# Altium PCB MICandFilter_PCB_design.PcbDoc
Units mm, origin at the board's own origin, x right, y up, seen from the top; angles counter-clockwise.
Board outline 86.11 x 63.5 mm, 2 copper layers (Top Layer, Bottom Layer); 18 components, 12 nets, 56 pads, 0 vias.
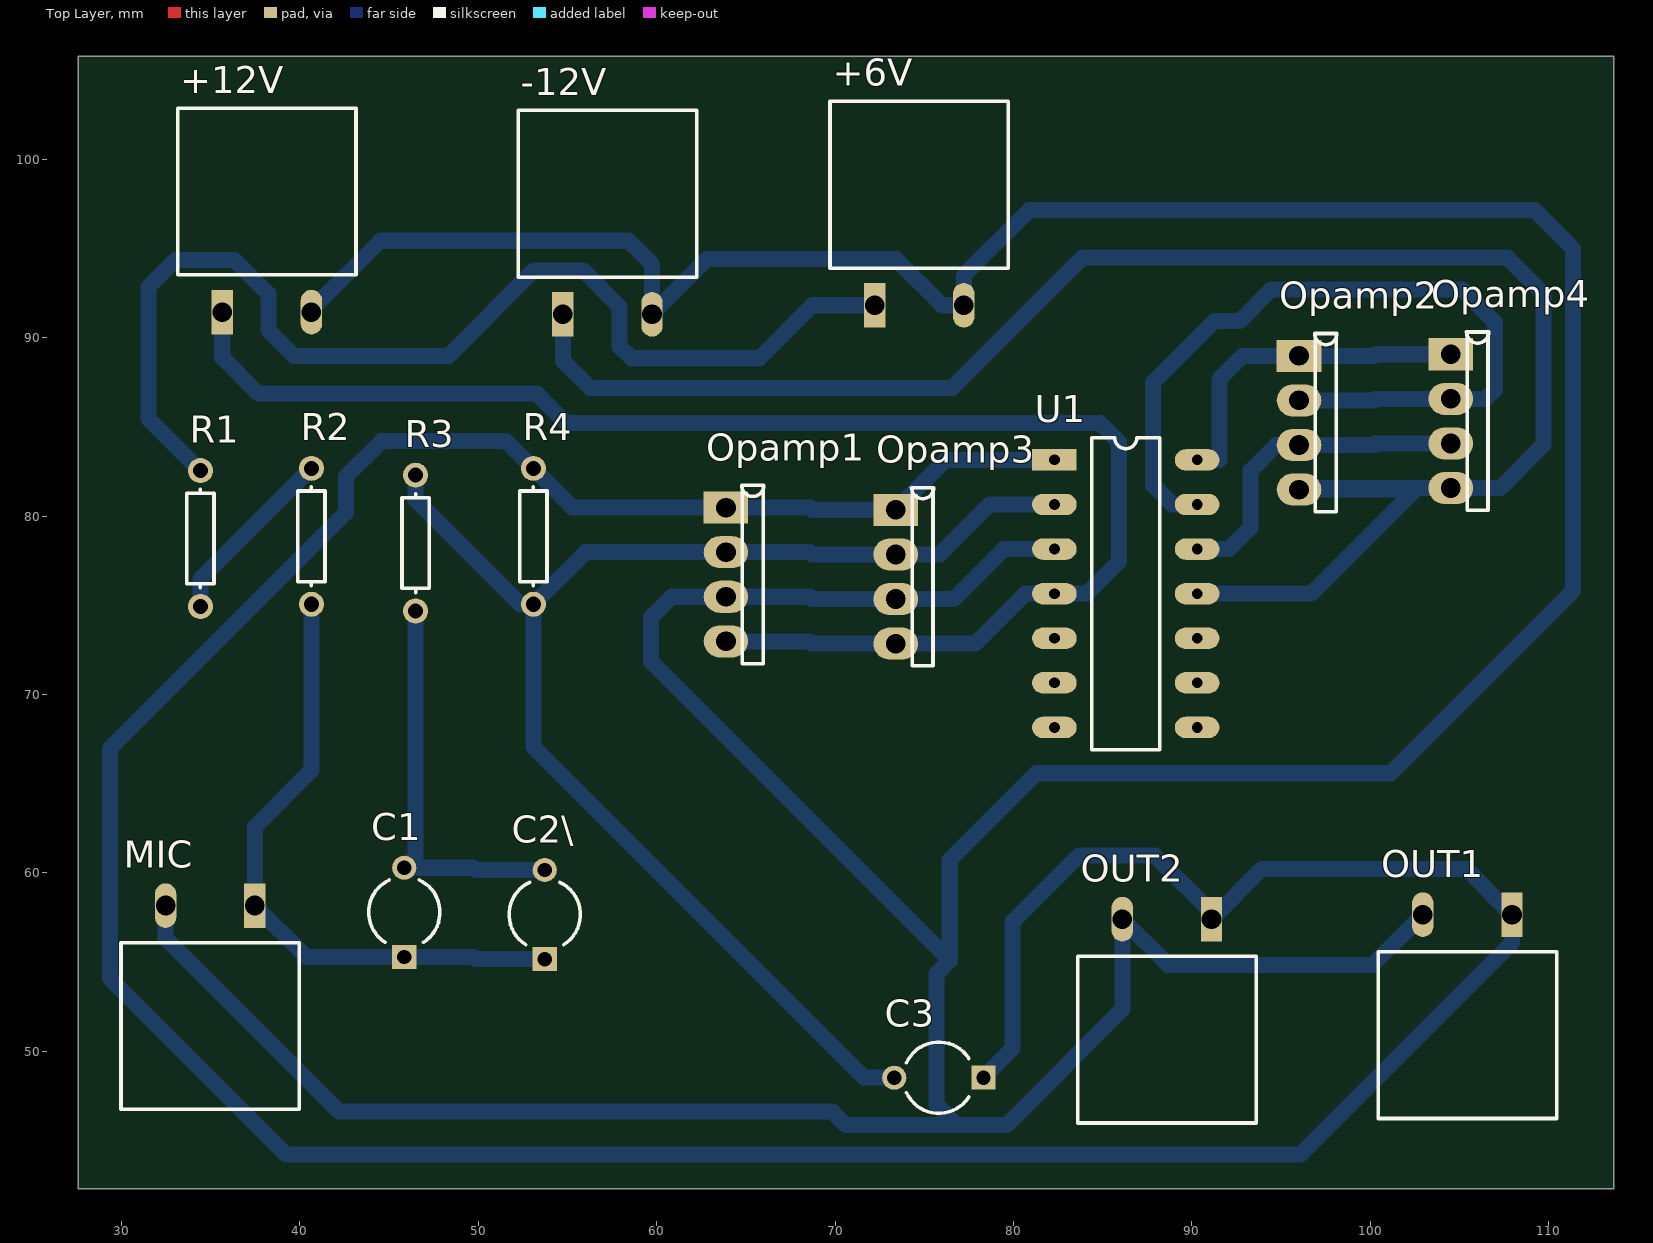
[diagram p0: Top Layer view]
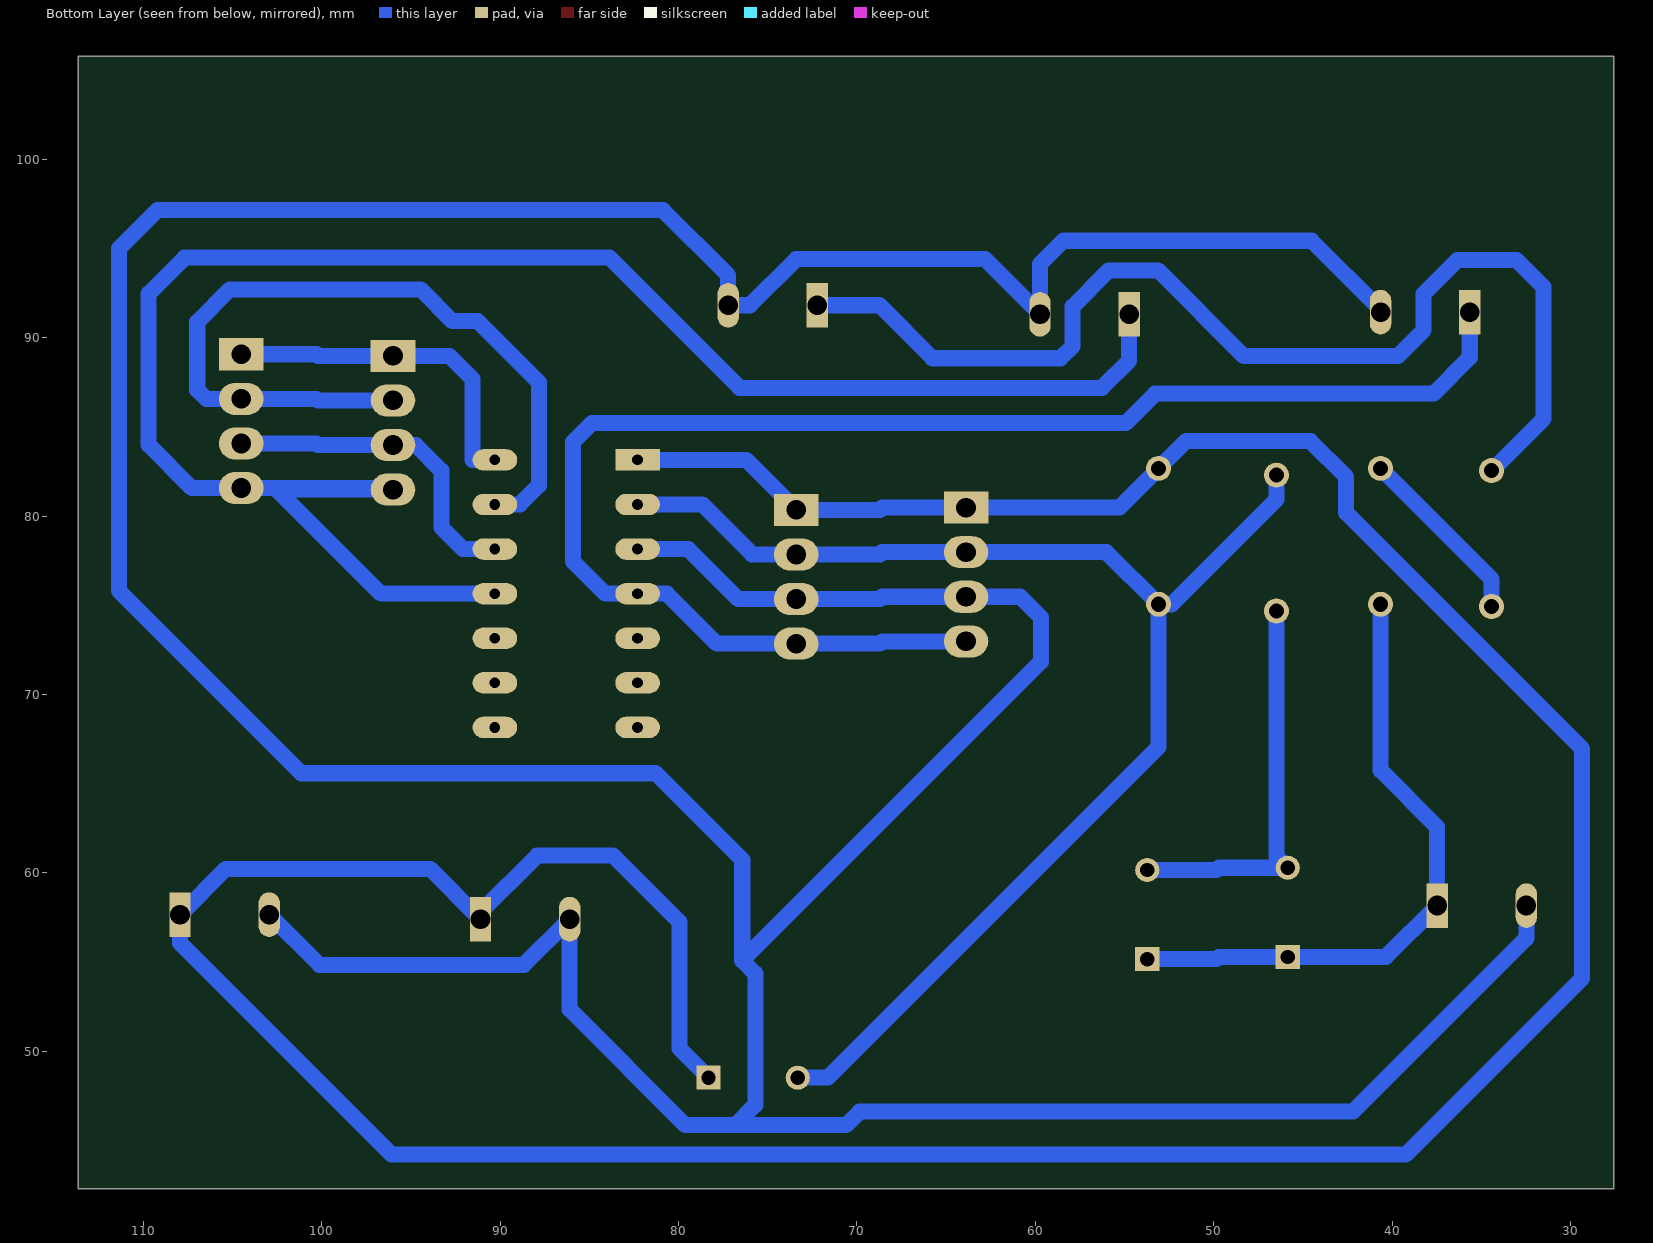
[diagram p1: Bottom Layer view, seen from below]

## Layer stack, top to bottom
Top Solder: solder mask 0.0102, Solder Resist, Dk 3.5
Top Layer: signal copper 0.0356
Dielectric 1: dielectric 0.32, FR-4, Dk 4.8
Bottom Layer: signal copper 0.0356
Bottom Solder: solder mask 0.0102, Solder Resist, Dk 3.5

## Board outline
27.559,105.791 113.665,105.791 113.665,42.291 27.559,42.291

## Design rules (kind name [scope] priority, off if disabled: settings)
Clearance [All] p1: gap=0.762 ignorepadtopadclearanceinfootprint=FALSE except(0: Text-Hole; 0.254: Text-Text)
PolygonConnect [All] p1: connectstyle=Relief reliefconductorwidth=0.254 reliefentries=4 polygonreliefangle="90 Angle" airgapwidth=0.254
RoomDefinition MICandFilter [InComponentClass('MICandFilter')] p1: confinementstyle=ConfineIn formatcopy=TRUE lockcomponents=FALSE outline 27.686,42.164 114.046,42.164 114.046,105.918 27.686,105.918
RoutingLayers [All] p1: top layer_v5=FALSE bottom layer_v5=TRUE
RoutingVias [All] p1: holewidth=0.711 width=1.27 viastyle="Through Hole" minholewidth=0.711 minwidth=1.27 maxholewidth=0.711 maxwidth=1.27
SolderMaskExpansion [All] p1: expansion=0.102
Width [All] p1: maxlimit=1 minlimit=0.254 preferedwidth=0.9 toplayer_maxwidth=0.254 toplayer_prefwidth=0.254 bottomlayer_minwidth=0.8 minimp=50.000000 maximp=50.000000 favimp=50.000000
29 further rules are at their usual default settings.

## Components (designator, comment, footprint, x,y, rotation, side; value= is the part's Value field where it differs from the comment)
+6V "Component_1" ConnectorBlue 72.216,91.821 r90 top
+12V "Component_1" ConnectorBlue 35.64,91.44 r90 top
-12V "Component_1" ConnectorBlue 54.737,91.313 r90 top
C1 "Cap2" CAPR5-4X5 45.847,57.785 r90 top value=4.7uf
C2\ "Cap2" CAPR5-4X5 53.721,57.658 r90 top value=3.3uF
C3 "Cap2" CAPR5-4X5 75.819,48.514 r180 top value=473
MIC "Component_1" ConnectorBlue 37.465,58.166 r270 top
Opamp1 "OLED" OLEDHEADER 63.881,80.478 r0 top
Opamp2 "OLED" OLEDHEADER 96.012,88.987 r0 top
Opamp3 "OLED" OLEDHEADER 73.406,80.351 r0 top
Opamp4 "OLED" OLEDHEADER 104.521,89.074 r0 top
OUT1 "Component_1" ConnectorBlue 107.95,57.658 r270 top
OUT2 "Component_1" ConnectorBlue 91.106,57.404 r270 top
R1 "Res1" AXIAL-0.3 34.417,78.74 r90 top value=560
R2 "Res1" AXIAL-0.3 40.64,78.867 r90 top value=560
R3 "Res1" AXIAL-0.3 46.482,78.486 r90 top value=1K
R4 "Res1" AXIAL-0.3 53.086,78.867 r90 top value=10K
U1 "Component_1" LM324N 82.297,83.152 r0 top

## Footprints (in the part's own frame and the unit in brackets; to place one, negate y for a bottom-side part, rotate by r counter-clockwise, add the part's x,y. Pads: shape width x height; smd on the part's side, far side on the other; paste and mask are expansions set on the pad)
AXIAL-0.3 [mm] "Axial Device, Thru-Hole; 2 Leads; 0.3 in Pin Spacing"
  round 1.4 hole 0.85: 1(-3.81,0) 2(3.81,0)
  silkscreen extent -2.77,-0.76 2.77,0.76
CAPR5-4X5 [mm] "Capacitor; 2 Leads"
  rect 1.35x1.35 hole 0.8: 1(-2.5,0)
  round 1.35 hole 0.8: 2(2.5,0)
  silkscreen extent -1.69,-2 1.82,2
ConnectorBlue [mm]
  rect 2.5x1.2 hole 1.1: 1(0,0)
  oval 2.5x1.2 hole 1.1: 2(0,-5)
  silkscreen extent 2.09,-7.5 11.43,2.5
LM324N [mm]
  rect 2.5x1.2 hole 0.6: 1(0,0)
  oval 2.5x1.2 hole 0.6: 2(0,-2.5) 3(0,-5) 4(0,-7.5) 5(0,-10) 6(0,-12.5) 7(0,-15) 8(8,-15) 9(8,-12.5) 10(8,-10) 11(8,-7.5) 12(8,-5) 13(8,-2.5) 14(8,0)
  silkscreen extent 2.08,-16.25 5.92,1.25
OLEDHEADER [mm]
  rect 2.5x1.8 hole 1.1: 1(0,0)
  oval 2.5x1.8 hole 1.1: 2(0,-2.5) 3(0,-5) 4(0,-7.5)
  silkscreen extent 0.87,-8.75 2.13,1.25, body extent -1.27,-8.89 1.91,1.27, height 9

## Part data
C1 C2\ C3: "Capacitor", PackageDescription="Capacitor; 2 Leads", PackageReference=CAPR5-4X5, Published=23-Sep-2002, Publisher="Altium Limited"
R1 R2 R3 R4: "Resistor", LatestRevisionDate=17-Jul-2002, LatestRevisionNote="Re-released for DXP Platform.", PackageDescription="Axial Device, Thru-Hole; 2 Leads; 0.3 in Pin Spacing", PackageReference=AXIAL-0.3, Published=8-Jun-2000, Publisher="Altium Limited"

## Nets (pads, with @x,y where several pads share a name; then routed paths per layer and width w, separated by ;. In a path a pad name is that pad's centre, name@x,y a point inside that pad or via, vN(x,y) a via of type N, cw(c..) or ccw(c..) an arc to the next point about the centre after c; other vN are vias at no path point)
GND: +6V.2 +12V.2 -12V.2 MIC.2 Opamp1.3 Opamp3.3 OUT1.2 OUT2.2 U1.3 | length 295.4
  Bottom Layer w0.9: MIC.2 32.465,56.333 42.189,46.609 69.85,46.609 70.601,45.858 76.824,45.858 ; +12V.2 40.64,91.564 44.513,95.437 58.42,95.437 59.737,94.12 -12V.2@59.737,91.333 ; -12V.2 -12V.2@59.737,91.333 ; U1.3 79.451,78.152 76.65,75.351 Opamp3.3 68.707,75.351 68.58,75.478 Opamp1.3 60.848,75.478 59.69,74.32 59.69,71.831 76.429,55.093 ; OUT1.2 100.131,54.839 88.671,54.839 OUT2.2 86.106,52.349 79.615,45.858 76.824,45.858 ; -12V.2@59.737,91.333 62.816,94.412 73.406,94.412 75.997,91.821 +6V.2 77.216,93.497 80.874,97.155 109.22,97.155 111.379,94.996 111.379,75.819 101.143,65.583 81.28,65.583 76.429,60.731 76.429,55.093 ; 76.429,55.093 75.692,54.356 75.692,46.99 76.824,45.858
Net+6V_1: +6V.1 R1.2 | length 62.8
  Bottom Layer w0.9: R1.2 31.496,85.471 31.496,92.837 33.02,94.361 36.322,94.361 38.227,92.456 38.227,90.424 39.675,88.976 48.311,88.976 53.11,93.775 55.88,93.775 57.912,91.743 57.912,89.535 58.596,88.851 65.762,88.851 68.732,91.821 +6V.1
Net+12V_1: +12V.1 Opamp1.4 Opamp3.4 U1.4 | length 85.5
  Bottom Layer w0.9: +12V.1 35.64,88.9 37.672,86.868 53.281,86.868 54.932,85.217 84.861,85.217 85.928,84.15 85.928,77.47 84.11,75.652 U1.4 80.656,75.652 77.855,72.851 Opamp3.4 68.707,72.851 68.58,72.978 Opamp1.4
Net-12V_1: -12V.1 Opamp2.4 Opamp4.4 U1.11 | length 106.4
  Bottom Layer w0.9: -12V.1 54.737,88.715 56.263,87.189 76.572,87.189 83.871,94.488 107.696,94.488 109.717,92.467 109.717,84.001 107.29,81.574 Opamp4.4 96.099,81.574 Opamp2.4 102.529,81.487 96.694,75.652 U1.11
NetC1_1: C1.1 C2\.1 MIC.1 R2.1 | length 35.7
  Bottom Layer w0.9: R2.1 40.64,65.74 37.465,62.565 MIC.1 40.346,55.285 C1.1 49.708,55.285 49.835,55.158 C2\.1
NetC1_2: C1.2 C2\.2 R3.1 | length 22.6
  Bottom Layer w0.9: R3.1 46.482,60.92 C1.2 49.708,60.285 49.835,60.158 C2\.2
NetC3_1: C3.1 Opamp1.1 Opamp3.1 OUT1.1 OUT2.1 R4.2 U1.1 | length 209
  Bottom Layer w0.9: C3.1 79.958,50.153 79.958,57.254 83.664,60.96 87.931,60.96 91.106,57.785 OUT2.1 93.925,60.223 105.385,60.223 OUT1.1 107.95,56.058 96.088,44.196 39.243,44.196 29.337,54.102 29.337,66.954 42.57,80.188 42.57,82.201 44.577,84.208 51.555,84.208 R4.2 55.285,80.478 Opamp1.1 68.58,80.478 68.707,80.351 Opamp3.1 76.207,83.152 U1.1
NetC3_2: C3.2 Opamp1.2 Opamp3.2 R3.2 R4.1 U1.2 | length 78
  Bottom Layer w0.9: R3.2 46.482,80.924 52.349,75.057 R4.1 ; C3.2 71.628,48.514 53.086,67.056 R4.1 ; U1.2 78.671,80.652 75.87,77.851 Opamp3.2 68.707,77.851 68.58,77.978 Opamp1.2 56.007,77.978 R4.1
NetOpamp2_1: Opamp2.1 Opamp4.1 U1.14 | length 19.3
  Bottom Layer w0.9: U1.14 91.547,83.152 91.547,87.686 92.848,88.987 Opamp2.1 100.203,88.987 100.29,89.074 Opamp4.1
NetOpamp2_2: Opamp2.2 Opamp4.2 U1.13 | length 45.8
  Bottom Layer w0.9: U1.13 88.9,80.652 87.833,81.719 87.833,87.503 91.262,90.932 92.683,90.932 94.461,92.71 105.156,92.71 106.985,90.881 106.985,87.082 106.477,86.574 Opamp4.2 100.29,86.574 100.203,86.487 Opamp2.2
NetOpamp2_3: Opamp2.3 Opamp4.3 U1.12 | length 18.5
  Bottom Layer w0.9: U1.12 92.075,78.152 93.294,79.371 93.294,82.55 94.731,83.987 Opamp2.3 100.203,83.987 100.29,84.074 Opamp4.3
NetR1_1: R1.1 R2.2 | length 10.3
  Bottom Layer w0.9: R1.1 34.417,76.454 R2.2
pads on no net: U1.5 U1.6 U1.7 U1.8 U1.9 U1.10